# Allegro board CY3689-Layout.brd
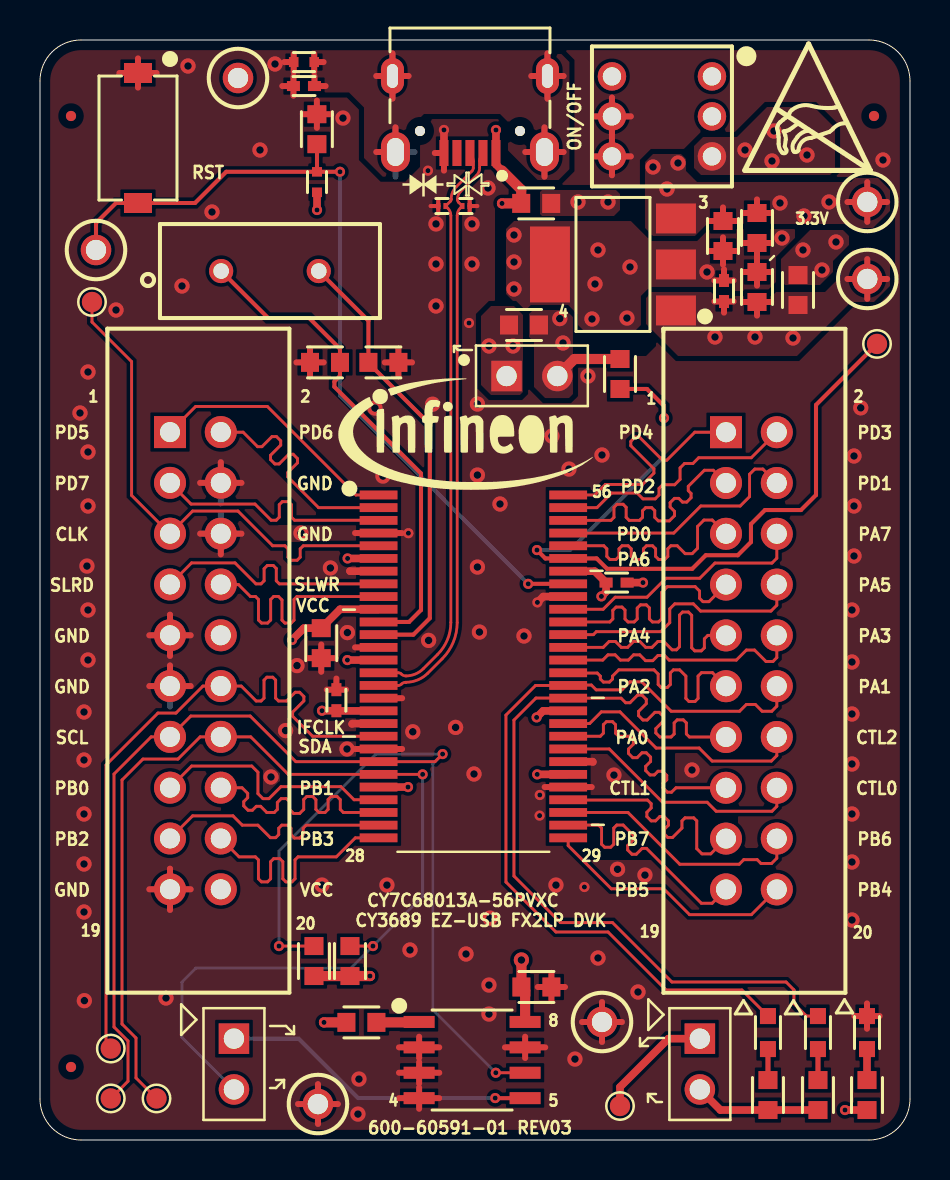
[diagram p0: board, top side]
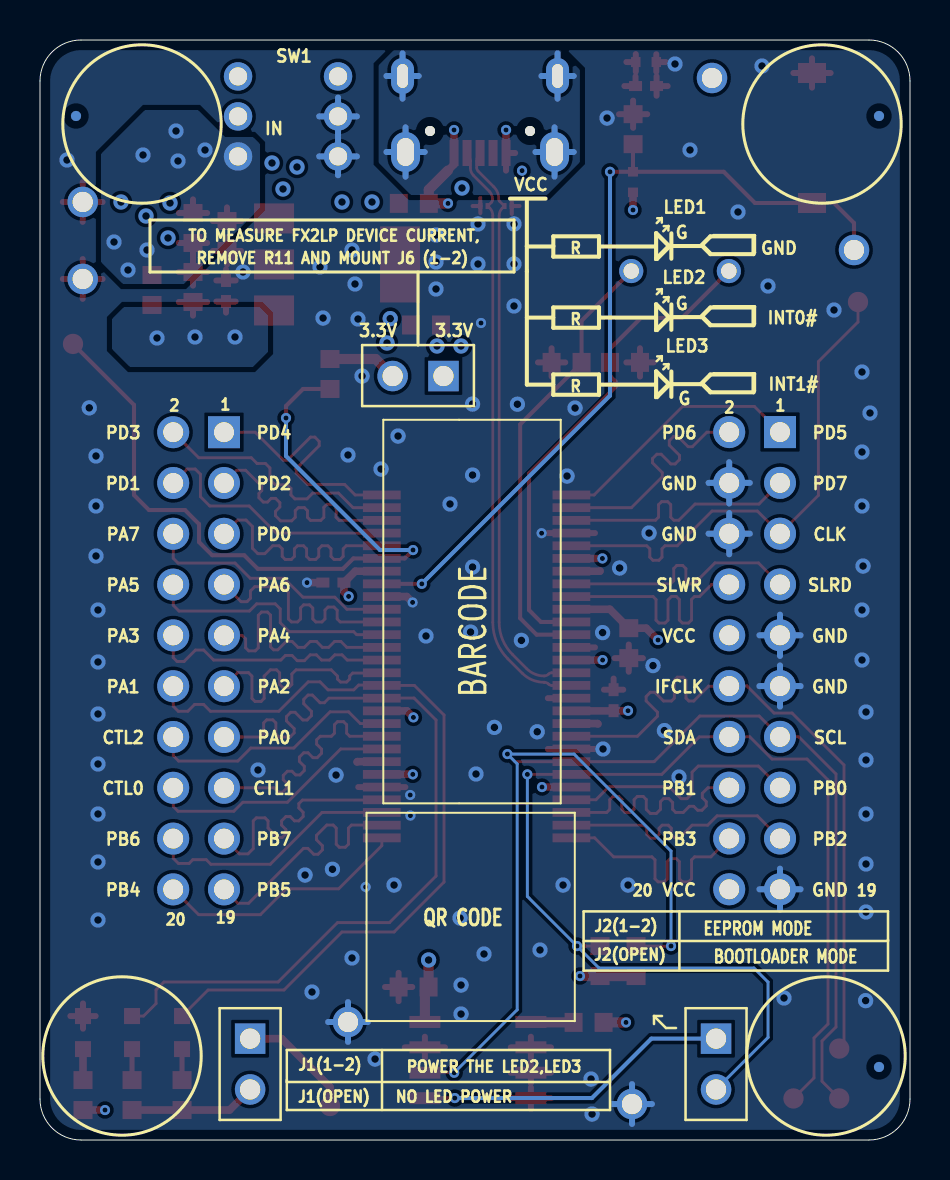
[diagram p1: board, bottom side, seen from below]

Outline 43.5 x 55 mm; copper layers: TOP, GND, VCC, BOTTOM. Coordinates in mm from the lower left corner of the outline.
Outline path: 0,52.95 0,2.05 arc(0.6,0.6) 2.05,0 41.45,0 arc(42.9,0.6) 43.5,2.05 43.5,52.95 arc(42.9,54.4) 41.45,55 2.05,55 arc(0.6,54.4) 0,52.95

## Design rules (mm)
net group DP1: nets DM DP
net group CONTROL & DATA: nets CTL0 CTL1 CTL2 PA2 PA3 PA4 PA5 PA6 PA7 PB0 PB1 PB2 PB3 PB4 PB5 PB6 PB7 PD0 PD1 PD2 PD3 PD4 PD5 PD6 PD7 SLRD SLWR

## Placement (name value [footprint] x y rotation side)
C1  10uF  [SMD0603]  14.06 24.84 90 top
C2  12pF  [SMD0603]  14.25 38.88 0 top
C3  12pF  [SMD0603]  17.17 38.88 180 top
C4  1uF  [SMD0603]  13.84 50.54 90 top
C5  22uF  [SMD0603]  35.85 45.6 270 top
C6  0.1uF  [CAPC1005X56N_CYPS]  34.2 42.45 270 top
C7  10uF  [SMD0603]  35.85 42.65 270 top
C8  0.1uF  [SMD0603]  24.82 7.65 0 top
C9  0.1uF  [SMD0603]  34.15 45.2 270 top
C10  0.01 uF  [CAPC1005X56N_CYPS]  13.2 52.7 0 top
C11  0.1uF  [CAPC1005X56N_CYPS]  14.82 21.99 270 top
C12  0.1uF  [CAPC1005X56N_CYPS]  28.83 27.87 180 top
CLKOUT  TP  [SMD-TESPOINT]  2.6 41.9 0 top
D3  ESD131-B1-W0201  [DFN58X28X16-2N]  20.1 46.7 0 top
D4  ESD131-B1-W0201  [DFN58X28X16-2N]  21.3 46.7 180 top
F1  FUSE BOARD MOUNT 1A 32VDC 0603  [SMD0603]  24.81 46.83 180 top
GND1  BLACK  [TP-43R_S]  28.1 5.9 0 top
GND2  BLACK  [TP-43R_S]  13.9 1.8 0 top
IFCLK  TP  [SMD-TESPOINT]  3.54 4.57 0 top
J1  -  [HDR_1X2]  32.99 3.8 270 top
J2  -  [HDR_1X2]  9.7 3.8 270 top
J3  SBH11-PBPC-D10-ST-BK  [SULLINS_SBH11-PBPC-D10-ST-BK]  6.5 35.4 270 top
J4  SBH11-PBPC-D10-ST-BK  [SULLINS_SBH11-PBPC-D10-ST-BK]  34.3 35.39 270 top
J5  629105150521  [WURTH_629105150521]  22.8 49.4 180 top
J6  -  [HDR_1X2]  24.6 38.2 0 top
LED1  GREEN LED SMD  [LEDC1608X75N]  41.35 5.37 90 top
LED2  GREEN LED SMD  [LEDC1608X75N]  38.9 5.37 90 top
LED3  GREEN LED SMD  [LEDC1608X75N]  36.4 5.37 90 top
NOREF  -  []  21.11 46.7 0 top
NOREF#2  -  [unnamed#2]  1.55 51.2 0 top
NOREF#3  -  []  13.05 49.3 90 top
NOREF#4  -  []  20.4 46.54 90 top
NOREF#5  -  []  61.96 78.7 0 top
NOREF#6  -  []  -349.78 -202.45 0 top
NOREF#7  -  []  19.91 46.7 0 top
NOREF#8  -  []  16.36 41.1 90 top
NOREF#9  -  []  6 45.06 0 top
NOREF#10  -  [unnamed#2]  41.7 51.2 0 top
NOREF#11  -  []  30.6 89.6 0 top
NOREF#12  -  []  6.85 53.2 0 top
NOREF#13  -  []  22.21 46.23 90 top
NOREF#14  -  []  6.89 0 90 top
NOREF#15  -  []  19.79 46.85 0 top
NOREF#16  -  []  0 41.77 0 top
NOREF#17  -  []  9.06 43.45 0 top
NOREF#18  -  []  38.17 51.29 0 top
NOREF#19  -  []  42.93 0.63 0 top
NOREF#20  -  [unnamed#2]  1.55 3.65 0 top
NOREF#21  -  []  -42.75 -51.67 0 top
NOREF#22  -  []  21.6 46.54 0 top
NOREF#23  -  []  15.57 11.8 180 bottom
NOREF#24  -  [unnamed#2]  1.55 3.65 180 bottom
NOREF#25  -  [unnamed#2]  1.55 51.2 180 bottom
NOREF#26  -  [unnamed#2]  41.7 51.2 180 bottom
R1  10K  [SMD0603]  16.07 5.88 0 top
R2  2.2K  [SMD0603]  13.7 8.95 90 top
R3  100K  [RESC1005X40N_PEC]  13.85 47.9 90 top
R4  10K  [SMD0603]  29 38.3 270 top
R5  2.2K  [SMD0603]  15.5 8.95 90 top
R6  1K  [SMD0603]  41.35 2.25 90 top
R7  1K  [SMD0603]  38.9 2.25 270 top
R8  1K  [SMD0603]  36.4 2.25 270 top
R9  0E  [SMD0603]  37.9 42.5 90 top
R10  100K  [RESC1005X40N_PEC]  13.2 53.9 0 top
R11  0E  [SMD0603]  24.2 40.75 180 top
RESET  TP_YEL  [TP-43R_S]  2.8 44.5 0 top
SCL  TP  [SMD-TESPOINT]  3.54 2.08 0 top
SDA  TP  [SMD-TESPOINT]  5.83 2.08 0 top
SW1  Pushbutton Switch DPDT  [TL2230EEF140]  33.6 53.18 90 top
SW2  Tactile Switch SPST  [SW_PTS636SKG43JSMTRLFS]  4.9 50.1 270 top
U1  CY7C68013A-56PVXC  [56_SSOP]  21.67 23.68 270 top
U2  IFX25001MEV33HTSA1  [SOT223]  28.65 43.78 90 top
U3  CAT24C128WI-GT3  [SOIC127P600X175-8N]  21.61 4 0 top
UNK3.3V  TP  [SMD-TESPOINT]  29 1.7 0 top
UNK5V  RED  [TP-43R_S]  41.36 43.05 0 top
VBUS  RED  [TP-43R_S]  9.9 53.1 0 top
VCC  RED  [TP-43R_S]  41.36 46.9 0 top
WAKEUP  TP  [SMD-TESPOINT]  41.85 39.8 0 top
X1  24MHz  [XTAL_ATS-SM]  11.5 43.45 0 top

## Library data of the parts
C1 C7-C9 = CAPACITOR NON-POL
C2 C3 = CAP NP: tolerance: 5%
C4 C6 C11 C12 = CAP NP
C5 = C_np
C10 = 0_0.01 uFd 0402 X7R
CLKOUT IFCLK SCL SDA UNK3.3V WAKEUP = TEST POINT_1
D3 D4 = BZX84C18/SOT_1
F1 = FUSE
GND1 GND2 UNK5V VBUS VCC = TEST_POINT
J1 J2 J6 = HEADER_1x2
J3 J4 = BERGSTICK_HDR
J5 = USB MICRO_B_4
LED1-LED3 = LED_0
R1 R6 = RESISTOR
R2 R4 R5 R7-R9 R11 = R
R3 R10 = 330 ohm 5% 0805_0
RESET = TP
SW1 = SW_T_SPDT_2
SW2 = EVQ-PE105K
U1 = CY7A60813A_1
U2 = L7809/TO3_4
U3 = 24LC128_0
X1 = crystal_ECS240_0

## Footprints (pads in the part's own frame, mm; a bottom-side part is the same pattern mirrored in y, then rotated)
56_SSOP
  rect 0.44x1.89 smd: 1(-8.572,-4.74) 2(-7.938,-4.74) 3(-7.302,-4.74) 4(-6.668,-4.74) 5(-6.032,-4.74) 6(-5.398,-4.74) 7(-4.762,-4.74) 8(-4.128,-4.74) 9(-3.492,-4.74) 10(-2.858,-4.74) 11(-2.222,-4.74) 12(-1.588,-4.74) 13(-0.952,-4.74) 14(-0.318,-4.74) 15(0.318,-4.74) 16(0.952,-4.74) 17(1.588,-4.74) 18(2.222,-4.74) 19(2.858,-4.74) 20(3.492,-4.74) 21(4.128,-4.74) 22(4.762,-4.74) 23(5.398,-4.74) 24(6.032,-4.74) 25(6.668,-4.74) 26(7.302,-4.74) 27(7.938,-4.74) 28(8.572,-4.74) 29(8.572,4.74) 30(7.938,4.74) 31(7.302,4.74) 32(6.668,4.74) 33(6.032,4.74) 34(5.398,4.74) 35(4.762,4.74) 36(4.128,4.74) 37(3.492,4.74) 38(2.858,4.74) 39(2.222,4.74) 40(1.588,4.74) 41(0.952,4.74) 42(0.318,4.74) 43(-0.318,4.74) 44(-0.952,4.74) 45(-1.588,4.74) 46(-2.222,4.74) 47(-2.858,4.74) 48(-3.492,4.74) 49(-4.128,4.74) 50(-4.762,4.74) 51(-5.398,4.74) 52(-6.032,4.74) 53(-6.668,4.74) 54(-7.302,4.74) 55(-7.938,4.74) 56(-8.572,4.74)
CAPC1005X56N_CYPS
  rect 0.65x0.5 smd: 1(-0.526,0) 2(0.526,0)
DFN58X28X16-2N
  rect 0.22x0.3 smd: 1(-0.185,0) 2(0.185,0)
HDR_1X2
  rect 1.524x1.524 hole 1.016: 1(-1.27,0)
  round 1.524 hole 1.016: 2(1.27,0)
LEDC1608X75N
  rect 0.8x0.8 smd: 1(-0.825,0) 2(0.825,0)
RESC1005X40N_PEC
  rect 0.475x0.5 smd: 1(-0.513,0) 2(0.513,0)
SMD0603
  rect 0.899x0.95 smd: 1(-0.749,0) 2(0.749,0)
SMD-TESPOINT
  round 1.016 smd: 1(0,0)
SOIC127P600X175-8N
  rect 1.55x0.6 smd: 1(-2.65,1.905) 2(-2.65,0.635) 3(-2.65,-0.635) 4(-2.65,-1.905) 5(2.65,-1.905) 6(2.65,-0.635) 7(2.65,0.635) 8(2.65,1.905)
SOT223
  rect 1.5x2 smd: 1(-2.3,-3.15) 2(0,-3.15) 3(2.3,-3.15)
  rect 3.8x2 smd: 4(0,3.15)
SULLINS_SBH11-PBPC-D10-ST-BK
  rect 1.6x1.6 hole 1: 1(0,0)
  round 1.6 hole 1: 2(0,2.54) 3(2.54,0) 4(2.54,2.54) 5(5.08,0) 6(5.08,2.54) 7(7.62,0) 8(7.62,2.54) 9(10.16,0) 10(10.16,2.54) 11(12.7,0) 12(12.7,2.54) 13(15.24,0) 14(15.24,2.54) 15(17.78,0) 16(17.78,2.54) 17(20.32,0) 18(20.32,2.54) 19(22.86,0) 20(22.86,2.54)
SW_PTS636SKG43JSMTRLFS
  rect 1x1.4 smd: A1(-3.25,0) B1(3.25,0)
TL2230EEF140
  round 1.422 hole 0.914: 1(0,0) 2(-2,0) 3(-4,0) 4(0,5) 5(-2,5) 6(-4,5)
TP-43R_S
  round 1.524 hole 1.016: 1(0,0)
unnamed#2
  round 0.508 smd: 1(0,0)
WURTH_629105150521
  round 0.5 hole 0.8 unplated: (-1.2,-1.05) (3.8,-1.05)
  rect 0.45x1.3 smd: 1(0,0.05) 2(0.65,0.05) 3(1.3,0.05) 4(1.95,0.05) 5(2.6,0.05)
  oval 1.45x2 hole 0.85x1.4: SH1(-2.425,0) SH2(5.025,0)
  oval 1.15x1.8 hole 0.55x1.2: SH3(-2.575,-3.8) SH4(5.175,-3.8)
XTAL_ATS-SM
  round 1.209 hole 0.777: 1(-2.44,0) 2(2.44,0)

## Nets
GND: C1.1 C2.1 C3.1 C4.2 C5.2 C6.1 C7.1 C8.2 C9.2 C10.1 C11.1 C12.1 D3.1 D4.1 GND1.1 GND2.1 J3.4 J3.6 J3.9 J3.11 J3.19 J5.5(GND) LED1.2(CATHODE) R10.1 SW1.5(GND) SW1.6(NO) SW2.A1 U1.4(GND1) U1.7(GND2) U1.13(AGND1) U1.17(AGND2) U1.19(GND3) U1.21(RESERVED) U1.33(GND4) U1.35(GND5) U1.48(GND6) U2.2(GND1) U2.4(GND2) U3.2(A1) U3.3(A2) U3.4(VSS) U3.7(WP)
GND_CHASSIS1: C10.2 J5.SH1 J5.SH2 J5.SH3 J5.SH4 R10.2
VBUS: F1.2 J5.1(VBUS) VBUS.1
VBUS_IN: F1.1 SW1.2(COMMON)
VCC: C5.1 C8.1 C9.1 J3.10 J3.20 J6.2 R1.1 R2.1 R3.1 R4.1 R5.1 R6.1 R11.1 U2.3(Q(OUT) U3.8(VCC) VCC.1
VIN: R9.2 SW1.3(NO1)
CLK: CLKOUT.1(\) J3.5 U1.5(CLKOUT)
CTL0: J4.16 U1.36(CTL0/*FLAGA)
CTL1: J4.15 U1.37(CTL1/*FLAGB)
CTL2: J4.14 U1.38(CTL2/*FLAGC)
DM: D4.2 J5.2(DM) U1.16(DMINUS)
DP: D3.2 J5.3(DP) U1.15(DPLUS)
IFCLK: IFCLK.1(\) J3.12 U1.20(IFCLK)
PA0: J4.13 LED2.2(CATHODE) U1.40(PA0/INT0#)
PA1: J4.12 LED3.2(CATHODE) U1.41(PA1/INT1#)
PA2: J4.11 U1.42(PA2/*SLOE)
PA3: J4.10 U1.43(PA3/*WU2)
PA4: J4.9 U1.44(PA4/FIFOADR0)
PA5: J4.8 U1.45(PA5/FIFOADR1)
PA6: J4.7 U1.46(PA6/PKTEND)
PA7: J4.6 U1.47(PA7/*FLAGD/SLCS#)
PB0: J3.15 U1.25(PB0/FD0)
PB1: J3.16 U1.26(PB1/FD1)
PB2: J3.17 U1.27(PB2/FD2)
PB3: J3.18 U1.28(PB3/FD3)
PB4: J4.20 U1.29(PB4/FD4)
PB5: J4.19 U1.30(PB5/FD5)
PB6: J4.18 U1.31(PB6/FD6)
PB7: J4.17 U1.32(PB7/FD7)
PD0: J4.5 U1.52(PD0/FD8)
PD1: J4.4 U1.53(PD1/FD9)
PD2: J4.3 U1.54(PD2/FD10)
PD3: J4.2 U1.55(PD3/FD11)
PD4: J4.1 U1.56(PD4/FD12)
PD5: J3.1 U1.1(PD5/FD13)
PD6: J3.2 U1.2(PD6/FD14)
PD7: J3.3 U1.3(PD7/FD15)
RESET_IN: C4.1 R3.2 RESET.1(TP) SW2.B1 U1.49(RESET#)
SCL: J3.13 R2.2 SCL.1(\) U1.22(SCL) U3.6(SCL)
SDA: J2.2 J3.14 R5.2 SDA.1(\) U1.23(SDA)
SLRD: J3.7 U1.8(RDY0/*SLRD)
SLWR: J3.8 U1.9(RDY1/*SLWR)
WAKEUP: R4.2 U1.51(WAKEUP) WAKEUP.1(\)
N18234159: C1.2 C11.2 C12.2 J1.1 J6.1 R11.2 U1.6(VCC1) U1.10(AVCC1) U1.14(AVCC2) U1.18(VCC2) U1.24(VCC3) U1.34(VCC4) U1.39(VCC5) U1.50(VCC6) UNK3.3V.1
N18329119: C3.2 U1.12(XTALIN) X1.2(G1)
N18329146: C2.2 U1.11(XTALOUT) X1.1
N18398447: J1.2 R7.2 R8.2
N18548754: C6.2 C7.2 R9.1 U2.1(I (IN)) UNK5V.1
N18554199: R1.2 U3.1(A0)
N18554223: J2.1 U3.5(SDA)
N184127501: LED2.1(ANODE) R7.1
N184127581: LED3.1(ANODE) R8.1
N185488561: LED1.1(ANODE) R6.2

Pads without a net: J5 4; NOREF#2 1; NOREF#10 1; NOREF#20 1; NOREF#24 1; NOREF#25 1; NOREF#26 1; SW1 1 4

## Via types
v1: diameter 0.508, hole 0.254, TOP to BOTTOM, 33 vias
v2: diameter 0.762, hole 0.381, TOP to BOTTOM, 113 vias

## Routing (per net, layer and track width the routed paths; a pad name or vN(x,y) marks a point on that pad's centre or on a via; arc(x,y) is an arc through that point)
GND: length 171.5
  TOP w0.203: D3.1 19.91,46.3 ; D3.1 19.53,46.7 ; D3.1 19.91,47.05 ; 21.48,46.7 21.48,46.34 ; 21.48,46.7 21.48,47.09 ; 21.48,46.7 21.87,46.7
  TOP w0.3: 3.97,53.35 SW2.A1 ; SW2.A1 5.83,53.35 ; SW2.A1 4.9,54.08 ; SW2.A1 4.9,52.62 ; 13.5,38.17 C2.1 ; C2.1 12.82,38.88 ; C2.1 14.18,38.88 ; C2.1 13.5,39.59 ; C9.2 34.15,45.13 ; C9.2 33.44,44.45 ; C9.2 34.86,44.45 ; C9.2 34.15,43.77 ; 18.96,1.56 U3.4 ; U3.4 19.96,2.09 ; U3.4 18.96,2.62 ; U3.4 17.95,2.09 ; 15.75,30.35 U1.4 18.11,30.35 ; 25.57,6.94 C8.2 ; C8.2 25.57,8.36 ; C8.2 24.89,7.65 ; C8.2 26.25,7.65 ; 14.06,23.41 C1.1 ; C1.1 14.77,24.09 ; C1.1 13.36,24.09 ; C1.1 14.06,24.77 ; 18.96,2.83 U3.3 ; U3.3 18.96,3.89 ; U3.3 19.96,3.36 ; U3.3 17.95,3.36 ; 6.5,11.5 J3.19 ; J3.19 5.47,12.54 ; J3.19 6.5,13.57 ; J3.19 7.53,12.54 ; GND2.1 14.89,1.8 ; GND2.1 12.9,1.8 ; GND2.1 13.9,0.8 ; GND2.1 13.9,2.79 ; 35.14,44.85 C5.2 ; C5.2 35.85,44.17 ; C5.2 36.56,44.85 ; U3.7 24.26,5.16 ; U3.7 25.26,4.63 ; U3.7 24.26,4.1 ; U3.7 23.25,4.63 ; U3.2 19.96,4.63 ; U3.2 18.96,5.16 ; U3.2 17.95,4.63 ; U3.2 18.96,4.1 ; 27.11,5.9 GND1.1 ; GND1.1 28.1,6.89 ; GND1.1 29.09,5.9 ; GND1.1 28.1,4.91 ; 12.22,53.9 R10.1 ; R10.1 12.68,54.29 ; R10.1 12.68,53.42 ; C7.1 35.85,44.08 ; C7.1 36.56,43.4 ; C7.1 35.14,43.4 ; C7.1 35.85,42.72 ; 12.67,52.22 C10.1 ; C10.1 12.12,52.7 ; C10.1 12.67,53.18 ; 15.75,19.55 U1.21 18.11,19.55 ; C11.1 14.82,23.07 ; C11.1 15.3,22.52 ; C11.1 14.34,22.52 ; 15.75,24.63 U1.13 ; 8.01,32.86 J3.4 ; J3.4 10.07,32.86 ; J3.4 9.04,33.89 ; 28.6,50.24 SW1.5 ; SW1.5 27.66,51.18 ; SW1.5 29.54,51.18 ; SW1.5 28.6,52.12 ; C4.2 14.55,51.29 ; C4.2 13.84,51.97 ; C4.2 13.84,50.61 ; C4.2 13.14,51.29 ; 27.59,17.65 U1.33 25.23,17.65 ; 5.47,22.7 J3.11 ; J3.11 6.5,23.73 ; J3.11 7.53,22.7 ; 33.72,42.98 C6.1 ; C6.1 34.2,43.53 ; C6.1 34.68,42.98 ; 28.6,48.24 SW1.6 ; SW1.6 28.6,50.12 ; SW1.6 27.66,49.18 ; SW1.6 29.54,49.18 ; C3.1 18.6,38.88 ; C3.1 17.92,39.59 ; C3.1 17.92,38.17 ; C3.1 17.24,38.88 ; 19.74,49.35 J5.5 20.2,48.47 ; 40.72,6.2 LED1.2 ; LED1.2 41.98,6.2 ; LED1.2 41.35,5.57 ; LED1.2 41.35,6.83 ; J3.6 10.07,30.32 ; J3.6 8.01,30.32 ; J3.6 9.04,29.28 ; J3.9 7.53,25.24 ; J3.9 5.47,25.24 ; J3.9 6.5,26.27 ; J3.9 6.5,24.2 ; 18.11,22.09 U1.17
  TOP w0.381: C12.1 v1(30.15,27.87) ; v1(24.87,26.88) 25.16,27.17 U1.48 ; 27.65,18.9 27.63,18.92 U1.35 ; 15.5,28.45 15.5,28.44 U1.7 ; J5.5 v1(20.2,50.5) ; U1.19 15.62,20.82 15.6,20.8
  GND w0.3: J3.6 10.07,30.32 ; J3.6 9.04,29.28 ; J3.6 8.01,30.32 ; J3.6 9.04,31.35 ; 28.6,50.24 SW1.5 ; SW1.5 28.6,52.12 ; SW1.5 27.66,51.18 ; SW1.5 29.54,51.18 ; 8.01,32.86 J3.4 ; J3.4 10.07,32.86 ; J3.4 9.04,31.82 ; J3.4 9.04,33.89 ; 13.9,0.8 GND2.1 ; GND2.1 13.9,2.79 ; GND2.1 14.89,1.8 ; GND2.1 12.9,1.8 ; J3.11 7.53,22.7 ; J3.11 6.5,23.73 ; J3.11 5.47,22.7 ; J3.11 6.5,21.66 ; 28.1,4.91 GND1.1 ; GND1.1 28.1,6.89 ; GND1.1 29.09,5.9 ; GND1.1 27.11,5.9 ; 28.6,48.24 SW1.6 ; SW1.6 29.54,49.18 ; SW1.6 27.66,49.18 ; SW1.6 28.6,50.12 ; J3.19 6.5,13.57 ; J3.19 7.53,12.54 ; J3.19 6.5,11.5 ; J3.19 5.47,12.54 ; 5.47,25.24 J3.9 ; J3.9 7.53,25.24 ; J3.9 6.5,24.2 ; J3.9 6.5,26.27
  BOTTOM w0.3: J3.9 6.5,26.27 ; J3.9 6.5,24.2 ; J3.9 5.47,25.24 ; J3.9 7.53,25.24 ; 9.04,29.28 J3.6 ; J3.6 8.01,30.32 ; J3.6 9.04,31.35 ; J3.6 10.07,30.32 ; GND2.1 14.89,1.8 ; GND2.1 12.9,1.8 ; GND2.1 13.9,0.8 ; GND2.1 13.9,2.79 ; 28.6,48.24 SW1.6 ; SW1.6 28.6,50.12 ; SW1.6 29.54,49.18 ; SW1.6 27.66,49.18 ; 6.5,21.66 J3.11 ; J3.11 7.53,22.7 ; J3.11 6.5,23.73 ; J3.11 5.47,22.7 ; GND1.1 29.09,5.9 ; GND1.1 28.1,6.89 ; GND1.1 27.11,5.9 ; GND1.1 28.1,4.91 ; J3.4 9.04,33.89 ; J3.4 10.07,32.86 ; J3.4 8.01,32.86 ; J3.4 9.04,31.82 ; 28.6,50.24 SW1.5 ; SW1.5 28.6,52.12 ; SW1.5 27.66,51.18 ; SW1.5 29.54,51.18 ; J3.19 6.5,13.57 ; J3.19 5.47,12.54 ; J3.19 6.5,11.5 ; J3.19 7.53,12.54
  vias: v1(18.42,30.34) v1(19.4,48.47) v1(21.45,40.85) v1(24.99,17.25) v1(24.98,16.22) v1(27.22,12.65) v2(2,36.35) v2(2.2,21.4) v2(2.2,19) v2(2.2,16.3) v2(2.2,13.8) v2(2.2,11.4) v2(2.22,6.97) v2(2.35,28.7) v2(2.4,38.4) v2(2.4,34.4) v2(2.4,31.7) v2(2.4,26.5) v2(2.4,24) v2(3.8,41.5) v2(6.3,7.1) v2(7.1,42.7) v2(7.4,53.7) v2(8.6,46.4) v2(11,49.5) v2(11.55,18.15) v2(11.75,53.8) v2(12.28,20.47) v2(12.85,23.72) v2(13.05,30.35) v2(14.1,12.75) v2(14.52,28.6) v2(15.15,51.1) v2(15.35,19.55) v2(15.37,25.37) v2(15.95,3.05) v2(15.9,1.3) v2(16.75,36.6) v2(17.15,33.2) v2(17.35,12.75) v2(18.5,9.5) v2(18.64,20.41) v2(19.43,24.98) v2(19.63,36.79) v2(19.8,45.8) v2(19.8,43.8) v2(19.8,41.7) v2(20.78,20.63) v2(21.3,9.3) v2(21.6,45.8) v2(21.6,43.8) v2(21.7,18.3) v2(21.87,36.8) v2(21.87,33.25) v2(21.87,28.65) v2(21.97,25.4) v2(22.4,47.6) v2(22.45,7.75) v2(22.45,6.3) v2(22.5,11.1) v2(23,31.8) v2(23.7,45.25) v2(23.7,43.9) v2(23.7,42.55) v2(24.2,25.2) v2(25.6,35.2) v2(25.8,12.75) v2(26.45,33.55) v2(26.75,4.05) v2(27.4,38.2) v2(27.6,41.05) v2(27.75,42.8) v2(27.9,44.5) v2(27.9,9.1) v2(28.1,34.25) v2(28.7,18.25) v2(28.88,13.54) v2(29.35,41.1) v2(29.5,43.65) v2(29.9,7.4) v2(30.25,13.25) v2(32.6,18.5) v2(33.35,43.4) v2(37.1,45.1) v2(40.6,26.5) v2(40.6,23.9) v2(40.6,21.3) v2(40.6,18.8) v2(40.6,16.3) v2(40.6,13.9) v2(40.6,11) v2(40.7,34.2) v2(40.7,31.7) v2(40.7,29.2) v2(41.04,36.61) v2(42.15,49)
GND_CHASSIS1: length 33.2
  TOP w0.3: 17.62,53.2 17.62,54.33 ; 17.62,53.2 18.43,53.2 ; 17.62,53.2 17.62,52.07 ; 17.62,53.2 16.82,53.2 ; 24.27,49.4 J5.SH1 ; J5.SH1 26.18,49.4 ; J5.SH1 25.22,48.17 ; J5.SH1 25.22,50.63 ; 13.71,53.42 R10.2 ; R10.2 13.71,54.3 ; R10.2 14.18,53.9 ; J5.SH3 26.18,53.2 ; J5.SH3 25.37,54.33 ; J5.SH3 25.37,52.07 ; J5.SH3 24.57,53.2 ; 14.28,52.7 C10.2 13.72,53.18 ; 16.82,49.4 J5.SH2 17.77,50.63
  BOTTOM w0.3: 25.37,52.07 J5.SH3 ; J5.SH3 26.18,53.2 ; J5.SH3 24.57,53.2 ; J5.SH3 25.37,54.33 ; J5.SH1 26.18,49.4 ; J5.SH1 25.22,50.63 ; J5.SH1 25.22,48.17 ; J5.SH1 24.27,49.4 ; J5.SH2 17.77,50.63 ; J5.SH2 17.77,48.17 ; J5.SH2 16.82,49.4 ; J5.SH2 18.73,49.4 ; 17.62,52.07 17.62,53.2 ; 17.62,53.2 16.82,53.2 ; 17.62,53.2 17.62,54.33 ; 17.62,53.2 18.43,53.2
VBUS: length 5.2
  TOP w0.381: 23.1,48.48 22.8,48.78 J5.1 v1(22.8,50.5)
  TOP w0.508: 23.1,48.48 24.06,47.51 F1.2 v1(23.1,46.83)
VBUS_IN: length 3.8
  VCC w0.3: 33.6,50.24 SW1.2 ; SW1.2 33.6,52.12 ; SW1.2 32.66,51.18 ; SW1.2 34.54,51.18
  vias: v2(26.9,46.9) v2(28.4,46.9)
VCC: length 32.9
  TOP w0.3: 40.37,46.9 VCC.1 ; VCC.1 41.36,45.91 ; VCC.1 41.36,47.89 ; VCC.1 42.36,46.9 ; C9.1 34.15,46.63 ; C9.1 33.44,45.95 ; C9.1 34.86,45.95 ; 35.14,46.35 C5.1 ; C5.1 35.85,47.03 ; C5.1 36.56,46.35
  TOP w0.381: R3.1 v1(13.85,46.5) ; R6.1 v1(40.25,1.5)
  TOP w0.508: v1(16.5,8.2) R5.1 R2.1 ; R4.1 26.72,39.05 J6.2 ; U3.8 24.26,7.46 C8.1 v2(24.07,9) ; R1.1 v1(14.2,5.88)
  VCC w0.3: J3.20 9.04,13.57 ; J3.20 10.07,12.54 ; J3.20 8.01,12.54 ; J3.20 9.04,11.5 ; J3.10 10.07,25.24 ; J3.10 9.04,24.2 ; J3.10 8.01,25.24 ; J3.10 9.04,26.27 ; 40.37,46.9 VCC.1 ; VCC.1 41.36,45.91 ; VCC.1 42.36,46.9 ; VCC.1 41.36,47.89
  vias: v2(25.99,41.07) v2(26.15,39.85) v2(30.65,48.65) v2(31.35,47.55) v2(31.9,48.85) v2(37,46.85) v2(38.2,46.2) v2(39.45,46.9)
VIN:
  vias: v2(35.25,49.5) v2(36.6,48.95) v2(36.7,50.45) v2(38.15,44.5) v2(38.35,49.25) v2(39.1,43.5) v2(39.8,44.9)
CLK: length 25.9
  TOP w0.145: CLKOUT.1 2.6,40.9 4.58,38.92 4.58,32.23 6.49,30.32 J3.5 7.63,31.45 9.9,31.45 11.63,29.71 12.25,29.71 12.4,29.56 12.4,29.14 12.55,28.99 12.86,28.99 13.01,29.14 13.01,29.56 13.16,29.71 U1.5
CTL0: length 12.8
  TOP w0.145: J4.16 36.84,16.68 36.6,16.44 33.81,16.44 33.36,16.89 31.13,16.89 28.46,19.55 U1.36
CTL1: length 12.7
  TOP w0.145: U1.37 28.02,20.19 28.17,20.34 28.17,20.77 28.32,20.92 28.63,20.92 28.78,20.77 28.78,20.34 28.93,20.19 29.49,20.19 29.67,20.01 29.67,19.79 29.42,19.55 29.42,19.33 29.64,19.12 29.85,19.12 30.1,19.36 30.31,19.36 30.53,19.15 30.53,18.93 30.29,18.69 30.29,18.47 30.5,18.25 30.72,18.25 30.9,18.44 31.13,18.44 31.34,18.23 31.34,18.01 31.15,17.82 31.15,17.61 31.36,17.39 31.58,17.39 31.8,17.61 J4.15
CTL2: length 12.7
  TOP w0.145: U1.38 27.48,20.82 28.07,21.41 29,21.41 30.81,19.6 32.96,19.6 33.61,18.95 36.57,18.95 36.84,19.22 J4.14
DM: length 29.8
  TOP w0.137: U1.16 17.91,22.73 arc(18,22.74) 18.07,22.8 arc(18.17,22.86) 18.29,22.89 arc(18.29,22.89) 18.29,22.89 arc(18.89,23) 19.39,23.34 20.11,24.06 arc(20.66,24.89) 20.86,25.88 20.86,46.22 arc(20.9,46.43) 21.02,46.6 D4.2 20.93,46.89 arc(20.89,46.94) 20.88,47 20.88,47.05 arc(20.92,47.26) 21.04,47.44 21.82,48.22 arc(21.94,48.4) 21.98,48.61 21.98,48.95 arc(22.02,49.17) J5.2
DP: length 29.3
  TOP w0.137: U1.15 17.91,23.36 arc(18,23.34) 18.07,23.3 arc(18.17,23.23) 18.29,23.2 arc(18.77,23.3) 19.16,23.56 19.88,24.28 arc(20.37,25.01) 20.54,25.88 20.54,46.22 arc(20.5,46.42) 20.39,46.59 20.28,46.7 20.53,46.94 arc(20.55,46.98) 20.56,47.02 20.56,47.05 arc(20.63,47.38) 20.81,47.66 21.6,48.45 arc(21.65,48.52) 21.66,48.61 21.66,48.95 arc(21.62,49.17) J5.3
IFCLK: length 34.4
  TOP w0.145: U1.20 13.63,20.19 12.63,21.19 12.63,21.39 13.19,21.96 13.19,22.17 12.98,22.39 12.76,22.39 12.33,21.95 11.93,21.95 11.78,22.09 11.78,23 11.64,23.14 11.35,23.14 11.2,23 11.2,22.09 11.06,21.95 10.81,21.95 10.06,22.7 J3.12 8.15,22.7 6.8,21.35 5.9,21.35 3.3,18.75 3.3,4.81 IFCLK.1
PA0: length 42.2
  TOP w0.145: J4.13 32.47,20.15 32.32,20.3 32.32,20.86 32.17,21.01 31.86,21.01 31.71,20.86 31.71,20.3 31.56,20.15 31,20.15 30.79,20.35 30.79,20.57 31.18,20.95 31.18,21.17 30.96,21.39 30.74,21.39 30.36,21 30.14,21 29.93,21.22 29.93,21.43 30.31,21.82 30.31,22.03 30.1,22.25 29.88,22.25 29.5,21.86 29.28,21.86 29.05,22.09 U1.40 26.4,22.1 24.8,22.1 23.7,21 23.7,13.2 26.03,10.87 28.62,10.87 31.59,7.9 37.3,7.9 37.7,7.5 37.7,6.82 38.32,6.2 LED2.2
PA1: length 40.6
  TOP w0.145: J4.12 36.84,21.69 36.59,21.44 36.11,21.44 35.77,21.78 35.32,21.78 34.98,21.44 31.56,21.44 30.09,22.91 29.5,22.91 29.1,22.51 27.81,22.51 27.57,22.75 26.43,22.75 U1.41 24.78,22.73 23.3,21.25 23.3,12.9 25.8,10.4 28.4,10.4 31.3,7.5 35.09,7.5 LED3.2
PA2: length 12.7
  TOP w0.145: U1.42 26.42,23.35 27.86,23.35 28.02,23.2 28.02,23.05 28.17,22.9 28.47,22.9 28.63,23.05 28.63,23.2 28.94,23.51 30.7,23.51 30.91,23.3 30.91,22.78 31.06,22.62 31.37,22.62 31.52,22.78 31.52,23.36 31.67,23.51 31.98,23.51 32.29,23.2 32.29,22.08 32.45,21.93 32.75,21.93 32.9,22.08 32.9,23.2 33.08,23.37 33.62,23.37 J4.11
PA3: length 12.7
  TOP w0.145: U1.43 28.14,24 28.4,24.26 28.76,24.26 29.02,24 29.42,24 29.68,24.26 29.99,24.26 30.28,23.97 30.64,23.97 30.9,24.23 31.23,24.23 31.46,24 34.82,24 35.32,24.5 35.73,24.5 36.3,23.93 36.65,23.93 36.84,24.12 J4.10
PA4: length 12.7
  TOP w0.145: U1.44 28.16,24.63 28.46,24.93 28.77,24.93 29.07,24.63 29.38,24.63 29.68,24.93 29.99,24.93 30.29,24.63 30.6,24.63 30.89,24.93 31.19,24.93 31.61,24.51 31.82,24.51 31.97,24.66 31.97,26.25 32.13,26.4 32.42,26.4 32.58,26.24 32.58,24.61 32.74,24.46 33.07,24.46 33.22,24.61 33.22,25.06 33.39,25.23 J4.9
PA5: length 12.8
  TOP w0.145: J4.8 36.84,26.74 36.55,26.45 33.03,26.45 32.67,26.81 31.74,26.81 31.49,26.56 31.49,25.87 31.04,25.42 27.82,25.42 27.67,25.27 U1.45
PA6: length 12.8
  TOP w0.145: J4.7 33.45,26.92 33.15,26.92 32.98,27.09 32.98,27.45 32.76,27.67 31.37,27.67 31.08,27.38 31.08,26.05 30.93,25.9 30.62,25.9 30.47,26.05 30.47,26.61 30.32,26.76 30.02,26.76 29.86,26.59 29.86,26.05 29.71,25.9 29.4,25.9 29.25,26.05 29.25,26.5 29.1,26.65 28.8,26.65 28.64,26.48 28.64,26.05 28.49,25.9 U1.46
PA7: length 12.7
  TOP w0.145: U1.47 28.16,26.54 28.76,27.14 30.35,27.14 31.3,28.09 32.99,28.09 33.75,28.85 36.6,28.85 36.84,29.09 J4.6
PB0: length 12.7
  TOP w0.145: U1.25 15.7,17.01 15.05,17.67 12.05,17.67 11.45,17.07 11.15,17.07 10.9,17.32 10.9,18.39 10.59,18.7 7.58,18.7 J3.15
PB1: length 12.7
  TOP w0.145: U1.26 15.17,16.38 15.01,16.53 15.01,17.02 14.85,17.18 14.56,17.18 14.4,17.02 14.4,16.53 14.25,16.38 13.95,16.38 13.8,16.53 13.8,17.02 13.63,17.18 13.34,17.18 13.19,17.02 13.19,16.53 12.98,16.33 12.68,16.33 12.48,16.53 12.48,16.92 12.32,17.07 12.06,17.07 11.87,16.88 11.87,16.53 11.72,16.38 11.34,16.38 11.03,16.68 10.82,16.68 10.62,16.49 10.4,16.49 10.19,16.7 10.19,16.92 10.38,17.12 10.38,17.33 10.11,17.61 9.05,17.61 J3.16
PB2: length 12.7
  TOP w0.145: J3.17 7.63,16.21 9.65,16.21 10.11,15.74 10.89,15.74 11.52,15.12 11.78,15.12 11.94,15.27 11.94,15.59 12.09,15.74 12.39,15.74 12.55,15.59 12.55,15.27 12.72,15.1 12.98,15.1 13.16,15.27 13.16,15.59 13.31,15.74 U1.27
PB3: length 12.8
  TOP w0.145: U1.28 15.77,15.11 14.82,14.16 12.9,14.16 12.75,14.01 12.75,13.06 12.6,12.91 12.29,12.91 12.14,13.06 12.14,13.91 11.99,14.07 11.68,14.07 11.53,13.91 11.53,13.06 11.38,12.91 11.07,12.91 10.92,13.06 10.92,14.01 10.77,14.16 9.95,14.16 9.04,15.07 J3.18
PB4: length 12.8
  TOP w0.145: J4.20 36.83,12.53 35.57,11.27 32.48,11.27 31.19,12.56 28.57,12.56 26.41,14.72 U1.29
PB5: length 12.7
  TOP w0.145: U1.30 26.41,15.75 27.93,15.75 28.08,15.6 28.08,14.79 28.23,14.64 28.54,14.64 28.69,14.79 28.69,15.6 28.84,15.75 29.16,15.75 29.68,15.23 29.68,15.01 29.38,14.72 29.38,14.5 29.6,14.29 29.81,14.29 30.11,14.58 30.32,14.58 33.07,11.84 33.61,11.84 J4.19
PB6: length 12.8
  TOP w0.145: U1.31 29.4,16.38 31.99,13.79 34.96,13.79 35.19,14.02 35.86,14.02 36.05,13.83 36.58,13.83 36.84,14.09 J4.18
PB7: length 12.7
  TOP w0.145: J4.17 33.54,14.31 33.1,14.31 32.84,14.57 32.84,15.96 32.69,16.11 32.25,16.11 32.1,15.96 32.1,15.6 31.63,15.13 31.39,15.13 31.21,15.31 31.21,15.53 31.42,15.74 31.42,15.96 31.2,16.17 30.99,16.17 30.77,15.96 30.56,15.96 30.34,16.17 30.34,16.39 30.56,16.6 30.56,16.82 30.38,17 26.42,17 U1.32
PD0: length 12.7
  TOP w0.145: J4.5 33.61,31 33.2,31 32.88,30.68 32.88,29.59 32.61,29.32 32.26,29.32 31.86,29.71 31.54,29.71 31.39,29.56 31.39,29.18 31.24,29.03 30.93,29.03 30.78,29.18 30.78,29.56 30.63,29.71 30.32,29.71 30.17,29.56 30.17,29.18 30.02,29.03 29.71,29.03 29.56,29.18 29.56,29.56 29.41,29.71 29.1,29.71 28.95,29.56 28.95,29.18 28.8,29.03 28.49,29.03 28.34,29.18 28.34,29.56 28.19,29.71 U1.52
PD1: length 12.7
  TOP w0.145: J4.4 36.14,33.55 35.74,33.55 35.48,33.29 35.48,32.17 35.01,31.7 33.04,31.7 31.69,30.35 U1.53
PD2: length 12.8
  TOP w0.145: U1.54 28.55,30.98 28.7,31.13 28.7,31.64 28.85,31.79 29.16,31.79 29.31,31.64 29.31,31.13 29.46,30.98 29.98,30.98 30.13,31.13 30.13,31.46 30.28,31.62 30.59,31.62 30.74,31.46 30.74,31.13 30.91,30.96 31.47,30.96 31.73,31.22 31.73,31.43 31.51,31.65 31.51,31.87 31.72,32.08 31.94,32.08 32.12,31.9 32.34,31.9 32.55,32.11 32.55,32.33 32.41,32.47 32.41,32.68 33.22,33.49 33.66,33.49 J4.3
PD3: length 12.8
  TOP w0.145: U1.55 27.85,31.62 28.58,32.35 29.86,32.35 30.15,32.06 30.76,32.06 30.95,32.25 30.95,32.58 31.13,32.76 31.73,32.76 32,33.03 32,33.6 32.23,33.82 32.64,33.82 32.93,34.11 35.56,34.11 J4.2
PD4: length 12.7
  TOP w0.145: J4.1 32.74,35.39 31.34,33.99 31.13,33.99 29.97,35.15 29.76,35.15 29.54,34.93 29.54,34.71 30.69,33.56 30.69,33.34 30.13,32.78 28.27,32.78 27.74,32.25 U1.56
PD5: length 12.8
  TOP w0.145: J3.1 7.78,36.68 11.37,36.68 15.79,32.25 U1.1
PD6: length 12.8
  TOP w0.145: J3.2 9.05,35.39 10.16,35.39 10.88,34.67 11.1,34.67 11.6,35.17 11.83,35.17 12.04,34.96 12.04,34.74 11.53,34.23 11.53,34.02 11.74,33.8 11.96,33.8 12.44,34.29 12.66,34.29 12.87,34.07 12.87,33.86 12.39,33.37 12.39,33.16 13.93,31.62 U1.2
PD7: length 12.7
  TOP w0.145: U1.3 16.92,30.99 12.73,30.99 12.57,31.14 12.57,31.77 12.42,31.92 12.12,31.92 11.96,31.77 11.96,31.14 11.81,30.99 11.56,30.99 10.75,31.8 7.55,31.8 6.5,32.85 J3.3
RESET_IN: length 42.5
  TOP w0.203: RESET.1 2.8,45.85 3.8,46.85 SW2.B1 7.75,46.85 9.31,48.41 R3.2 ; R3.2 v1(15,48.41) ; R3.2 13.85,49.79 C4.1 ; v1(24.41,27.81) U1.49
  BOTTOM w0.203: v1(24.41,27.81) 15,37.22 v1(15,48.41)
SCL: length 71.2
  TOP w0.145: v1(22.79,3.36) U3.6 ; SCL.1 4.4,2.94 4.4,4.95 3.7,5.65 3.7,18.3 5.56,20.16 J3.13 7.54,21.2 10.51,21.2 12.79,18.92 U1.22 19.75,18.92 v1(20.13,19.3) ; R2.2 v1(11.95,9.7)
  BOTTOM w0.145: v1(22.79,3.36) 19.64,6.51 19.64,18.81 v1(20.13,19.3) 16.8,19.3 11.95,14.45 11.95,9.7 v1(11.95,9.7)
SDA: length 60.8
  TOP w0.145: v1(16.65,9.7) 16.22,9.7 16.22,9.7 R5.2 ; SDA.1 4.8,3.1 4.8,5.1 4.1,5.8 4.1,18 5.15,19.05 6.9,19.05 8.01,20.16 J3.14 10.54,20.16 12.41,18.28 U1.23 v1(19.13,18.28)
  BOTTOM w0.145: J2.2 7.1,5.13 7.1,7.9 7.8,8.6 15.55,8.6 v1(16.65,9.7) 19.13,12.18 v1(19.13,18.28)
SLRD: length 12.8
  TOP w0.145: J3.7 7.58,28.85 9.75,28.85 10.8,27.81 11.05,27.81 11.2,27.96 11.2,28.57 11.37,28.73 11.66,28.73 11.81,28.57 11.81,27.96 11.97,27.81 U1.8
SLWR: length 12.7
  TOP w0.145: J3.8 9.05,27.77 9.93,27.77 10.52,27.17 10.78,27.17 10.92,27.03 10.92,26 11.08,25.85 11.38,25.85 11.53,26 11.53,27.03 11.69,27.18 11.92,27.18 12.1,27 12.1,25.99 12.24,25.85 12.55,25.85 12.7,25.99 12.7,27.03 12.85,27.17 U1.9
WAKEUP: length 38.6
  TOP w0.203: R4.2 30.35,37.55 31.2,36.7 v1(31.2,36.1) ; WAKEUP.1 38.8,36.75 38.8,32.25 38.05,31.5 36.25,31.5 35.55,30.8 35.55,29.9 34.89,29.24 33.29,29.24 32.61,28.56 28.35,28.56 27.83,29.08 U1.51 25.27,29.08 v1(24.85,29.5)
  BOTTOM w0.203: v1(31.2,36.1) 31.2,34.2 26.5,29.5 v1(24.85,29.5)
N18234159: length 28.5
  TOP w0.381: UNK3.3V.1 29,2.65 31.42,5.07 J1.1 ; v1(15.37,24) U1.14 ; U1.10 15.01,26.54 C1.2 13.19,25.59 v1(12.6,25) ; v1(24.86,18.28) U1.34 ; v1(14.1,21.46) C11.2 14.83,21.46 U1.18 ; v1(28.07,27.18) 28.3,27.41 C12.2 27.73,28.44 U1.50 ; U1.24 v1(18.4,17.65) ; U1.6 v1(15.38,29.08) ; v1(24.83,21.13) 25.16,21.46 U1.39
  VCC w0.3: 32.99,4.07 J1.1 ; J1.1 33.99,5.07 ; J1.1 32,5.07 ; J1.1 32.99,6.06
  vias: v2(22.45,39.7) v2(23.65,39.7)
N18329119: length 22.6
  TOP w0.203: U1.12 18.67,25.27 19.49,26.09 19.49,35.79 16.42,38.85 C3.2 16.42,40.96 X1.2
N18329146: length 24.9
  TOP w0.203: U1.11 18.45,25.9 19.05,26.5 19.05,33.33 14.72,37.66 14.72,37.92 15,38.2 C2.2 15,39.56 13.46,41.1 11.41,41.1 X1.1
N18398447: length 6.3
  TOP w0.381: J1.2 34.02,1.5 R8.2 R7.2
N18548754: length 7.6
  TOP w0.3: 33.72,41.92 C6.2 ; C6.2 34.2,41.37 ; C6.2 34.68,41.92 ; UNK5V.1 41.36,44.04 ; UNK5V.1 41.36,42.06 ; UNK5V.1 40.37,43.05 ; UNK5V.1 42.36,43.05 ; 35.14,41.9 C7.2 ; C7.2 35.85,41.22 ; C7.2 36.56,41.9
  vias: v2(33.75,40.15) v2(35.75,40.15) v2(37.65,40.1)
N18554199: length 2.1
  TOP w0.508: R1.2 18.93,5.88 U3.1
N18554223: length 15.8
  TOP w0.203: v1(22.76,2.1) 22.77,2.09 U3.5
  BOTTOM w0.203: J2.1 12.93,5.07 15.9,2.1 v1(22.76,2.1)
N184127501: length 1.6
  TOP w0.254: LED2.1 R7.1
N184127581: length 1.6
  TOP w0.254: LED3.1 R8.1
N185488561: length 1.6
  TOP w0.381: LED1.1 R6.2

## Copper pours and planes (outline as drawn; the poured copper is in the pictures)
GND on TOP: 2.05,0.51 0.96,0.96 0.51,2.05 0.51,52.95 0.96,54.04 2.05,54.49 12.81,54.49 13,54.3 13,52.95 13.15,52.8 13.25,52.8 13.65,53.2 13.65,54.49 41.45,54.49 42.54,54.04 42.99,52.95 42.99,2.05 42.54,0.96 41.45,0.51 ; 56 cut-outs
GND on BOTTOM, GND: 0.51,52.95 0.96,54.04 2.05,54.49 41.45,54.49 42.54,54.04 42.99,52.95 42.99,2.05 42.54,0.96 41.45,0.51 2.05,0.51 0.96,0.96 0.51,2.05
GND_CHASSIS1 on TOP: 17.13,48.17 16.2,49.1 16.2,51.63 15.45,52.38 13.72,52.38 13.53,52.57 13.53,54.41 13.61,54.49 25.44,54.49 25.44,54.3 26.07,54.3 26.47,53.9 26.47,48.54 25.93,48 24.88,48 23.4,49.48 23.4,50.9 23,51.3 19.2,51.3 18.75,50.85 18.75,48.76 18.16,48.17
GND_CHASSIS1 on BOTTOM: 16.51,53.51 16.51,48.89 18.15,47.25 24.95,47.25 26.57,48.87 26.57,53.73 25.81,54.49 17.49,54.49
VBUS on VCC: 8.75,53.3 8.75,49.35 10.85,47.25 21.1,47.25 22.3,46.05 23.15,46.05 23.45,46.35 23.45,50.4 21.95,51.9 12.25,51.9 10.25,53.9 9.35,53.9
VBUS_IN on TOP: 25,46.3 25,47.4 25.1,47.5 28.8,47.5 29,47.3 29,46.5 28.7,46.2 25.1,46.2
VBUS_IN on VCC: 27.45,43.4 25.95,44.9 25.95,47.29 26.41,47.75 28.65,47.75 29.55,46.85 32.15,46.85 32.9,47.6 32.9,49.8 31.65,51.05 31.65,51.99 32.01,52.35 36.65,52.35 37.55,51.45 37.55,48.75 32.2,43.4
VCC on TOP: 32.75,45.2 30.65,45.2 30.25,45.6 30.25,48.9 30.65,49.3 32.05,49.3 32.3,49.05 32.3,48.45 32.85,47.9 40.55,47.9 40.75,48.1 41.9,48.1 42.5,47.5 42.5,46.45 41.65,45.6 40.65,45.6 40.45,45.8 33.35,45.8
VCC on TOP: 24.45,40.15 24.7,39.9 24.7,37.65 25.25,37.1 26.45,37.1 26.65,37.3 26.65,41.15 26.35,41.45 26.35,41.45 26.3,41.5 24.65,41.5 24.45,41.3
VCC on VCC: 0.51,52.95 0.96,54.04 2.05,54.49 41.45,54.49 42.54,54.04 42.99,52.95 42.99,2.05 42.54,0.96 41.45,0.51 2.05,0.51 0.96,0.96 0.51,2.05
VIN on TOP: 37.05,42.95 37.05,44.05 38.5,45.5 40.15,45.5 40.45,45.2 40.45,44.75 39.65,43.95 39.65,43.4 39,42.75 37.25,42.75
VIN on TOP: 32.7,49.7 32.7,48.6 33.05,48.25 39.5,48.25 39.75,48.5 39.75,50.6 38.7,51.65 36.35,51.65 34.85,50.15 33.15,50.15
VIN on BOTTOM: 32.5,49.8 32.5,46.6 36.3,42.8 39.35,42.8 40.45,43.9 40.45,49.3 38.25,51.5 35.6,51.5 34.25,50.15 32.85,50.15
N18234159 on TOP: 22.05,41.2 22.05,37.75 22.55,37.25 24,37.25 24.15,37.4 24.15,41.25 23.7,41.7 22.55,41.7
N18234159 on VCC: 32.7,3.85 20.26,16.29 18,16.29 11.95,22.34 11.95,29.8 22.25,40.1 23.9,40.1 24.3,39.7 24.3,37.7 25.65,36.35 29.4,36.35 31.56,34.19 31.56,10.42 35.73,6.25 35.73,4.13 35.45,3.85
N18548754 on TOP: 31.9,39.2 30.3,40.8 30.3,42.1 30.6,42.4 33.55,42.4 33.75,42.2 36.6,42.2 36.8,42.4 39.25,42.4 40.05,43.2 40.05,43.9 40.65,44.5 42.05,44.5 42.5,44.05 42.5,42.7 41.7,41.9 40.55,41.9 37.85,39.2
N18548754 on BOTTOM: 32.1,41.25 32.1,39.4 32.85,38.65 39,38.65 39.9,39.55 39.9,41.05 39.3,41.65 32.5,41.65

## Text on the board
BOTTOM: BOTTOM
Board Geometry/Soldermask Bottom: SOLDERMASK BOTTOM
Package Geometry/Pastemask Bottom: PASTEMASK BOTTOM
Ref Des/Silkscreen Bottom: BOOTLOADER MODE | EEPROM MODE | J2(OPEN) | J2(1-2) | R | POWER THE LED2,LED3 | NO LED POWER | TO MEASURE FX2LP DEVICE CURRENT, | J1(OPEN) | REMOVE R11 AND MOUNT J6 (1-2) | J1(1-2) | PD5 | PD7 | CLK | SLRD | GND | SCL | PB0 | PB2 | INT1# | INT0# | LED3 | LED1 | G | LED2 | PD6 | SLWR | VCC | IFCLK | SDA | PB1 | PB3 | 3.3V | SW1 | IN | PD4 | PD2 | PD0 | PA6 | PA4 | PA2 | PA0 | CTL1 | PB7 | PB5 | PD3 | PD1 | PA7 | PA5 | PA3 | PA1 | CTL2 | CTL0 | PB6 | PB4 | QR CODE | BARCODE | SILKSCREEN BOTTOM
TOP: TOP
Board Geometry/Soldermask Top: SOLDERMASK TOP
Package Geometry/Pastemask Top: PASTEMASK TOP
Ref Des/Silkscreen Top: 28 | 29 | 56 | 3.3V | PD5 | PD7 | CLK | SLRD | GND | SCL | PB0 | PB2 | RST | VCC | SDA | PD6 | PB1 | PB3 | SLWR | IFCLK | CY7C68013A-56PVXC | 600-60591-01 REV03 | CY3689 EZ-USB FX2LP DVK | CTL1 | PA0 | PB7 | PB5 | PD0 | PA6 | PA4 | PA2 | PD4 | PD2 | PD3 | PD1 | PA7 | PA5 | PA3 | PA1 | PB6 | PB4 | CTL2 | CTL0 | ON/OFF | SILKSCREEN TOP
GND: LAYER-2 GND
VCC: LAYER-3 VCC
User.8: ASSEMBLY TOP
User.15: ASSEMBLY BOTTOM
User.18: PROJECT: | DRAWN BY: | LAYER: | DWG NO: | REV: | DATE: | SAN JOSE, CA 95134 | (408) 943-2600 | Crosslink FPGA camera board | HUSA | 610-XXXXX-01 | 01 | 12-NOV-2019
User.19: PANEL DIMENSION - 99.16 X 127.16 MM | ROUTING TOLERANCE-(+/-)0.2MM | SINGLE DIMENSION - 41X55 MM | FX2LP LEARNER KIT
User.22: E."MATERIAL TO BE USED IS GENERAL FR4 (IT180A)."
User.23: STACK-UP | LAYER | DESCRIPTION | L01 - TOP | L02 - PLANE | L03 - PLANE | L04 - BOTTOM | COPPER | 0.035 mm | START | WT | IMP | OHMS | SE | 50E | -- | 0.1450 mm | ----- | .----- | TRACE | WIDTH | --- | 02 | DIFF | 90E | 0.1371/0.1803 mm | WIDTH/SPACE | ---- | 1.6mm | +/- 10% | (0.0938 mm) | (1.19 mm) | REF
User.27: 2
User.45: FIGURE | SIZE | 0.254 | 0.381 | 0.7772 | 0.9144 | 1.0 | 1.016 | 0.8 | 1.2x0.55 | 1.4x0.85 | DRILL CHART: TOP to BOTTOM | ALL UNITS ARE IN MILLIMETERS | TOLERANCE | +0.0762/-0.0762 | +0.0508/-0.0508 | PLATED | NON-PLATED | QTY | 33 | 113 | 2 | 6 | 40 | 12
